# Altium PCB PCB1.PcbDoc
Units mil, origin at the board's own origin, x right, y up, seen from the top; angles counter-clockwise.
Board outline 5120 x 2360 mil, 2 copper layers (Top Layer, Bottom Layer); 11 components, 7 nets, 53 pads, 0 vias.
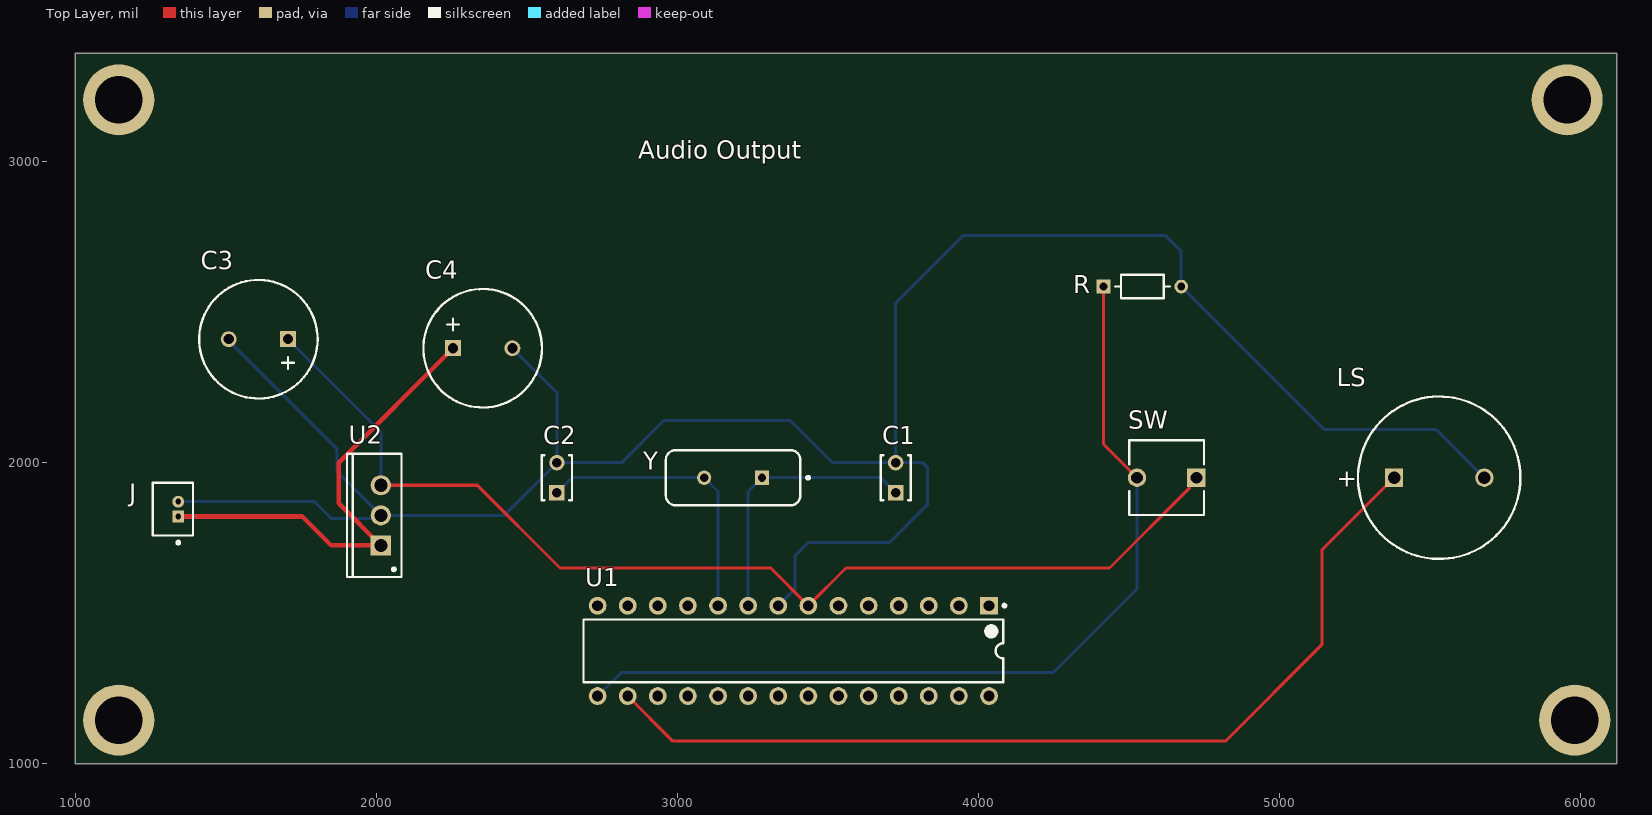
[diagram p0: Top Layer view]
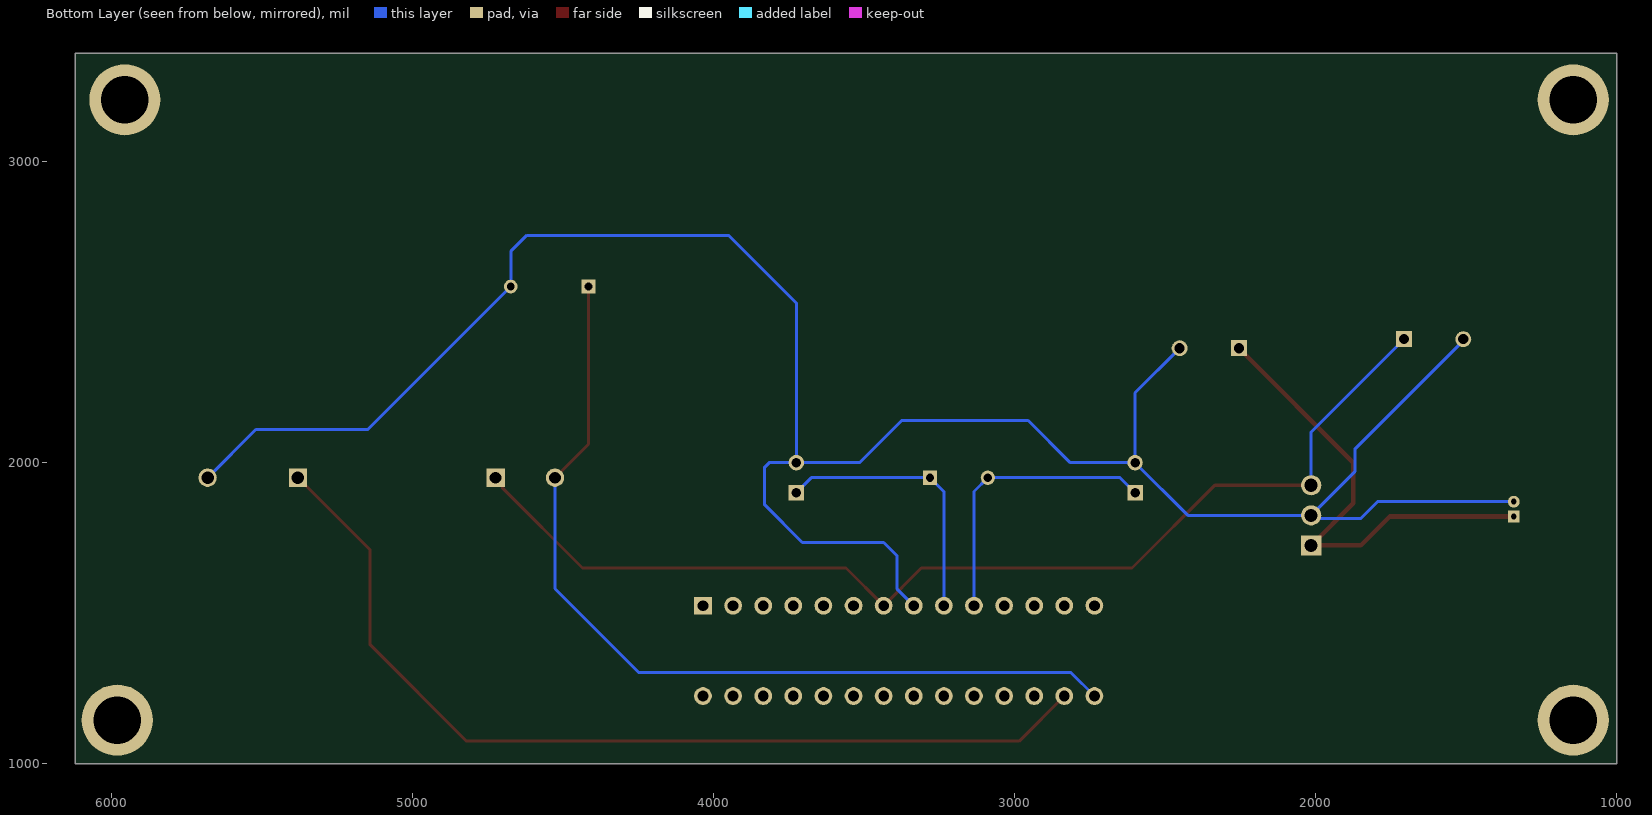
[diagram p1: Bottom Layer view, seen from below]

## Layer stack, top to bottom
Top Solder: solder mask 0.4, Solder Resist, Dk 3.5
Top Layer: signal copper 1.4
Dielectric 1: dielectric 12.6, FR-4, Dk 4.8
Bottom Layer: signal copper 1.4
Bottom Solder: solder mask 0.4, Solder Resist, Dk 3.5

## Board outline
1000,1000 6120,1000 6120,3360 1000,3360

## Design rules (kind name [scope] priority, off if disabled: settings)
Clearance [All] p1: gap=10 ignorepadtopadclearanceinfootprint=FALSE except(0: Arc-Hole Track-Hole SMDPad-Hole THPad-Hole Via-Hole Fill-Hole Poly-Hole Region-Hole Text-Hole)
PolygonConnect [All] p1: connectstyle=Relief reliefconductorwidth=10 reliefentries=4 polygonreliefangle="90 Angle" airgapwidth=10
RoutingVias [All] p1: holewidth=12 width=25 viastyle="Through Hole" minholewidth=8 minwidth=15 maxholewidth=125 maxwidth=130
SolderMaskExpansion [All] p1: expansion=4
Width [All] p1: maxlimit=100 minlimit=10 preferedwidth=20
30 further rules are at their usual default settings.

## Components (designator, comment, footprint, x,y, rotation, side; value= is the part's Value field where it differs from the comment)
C1 "22pF" KEMT-C315-THT-2 3725,1950 r90 top
C2 "22pF" KEMT-C315-THT-2 2600,1950 r90 top
C3 "10uF" NIC-UVC2G100MPD1TD-2_V 1608.43,2410 r180 top
C4 "10uF" NIC-UVC2G100MPD1TD-2_V 2353.43,2380 r0 top
J "53047-0210" FP-53047-0210-MFG 1324.57,1845.79 r270 top
LS "KPEG242" KINGS-KPEG242-2 5530,1950 r0 top
R "CF18JT10K0" FP-CF18-MFG 4544.13,2585 r0 top value=10kO
SW "EVQ-21505R" FP-EVQ-21505R-MFG 4625,1950 r180 top
U1 "ATmega328-PU" 28P3 3385,1375 r270 top
U2 "L7805CV" TO220 2015,1825 r90 top
Y "16MHz" FOX-FOXSLF160-20 3185,1950 r180 top

## Footprints (in the part's own frame and the unit in brackets; to place one, negate y for a bottom-side part, rotate by r counter-clockwise, add the part's x,y. Pads: shape width x height; smd on the part's side, far side on the other; paste and mask are expansions set on the pad)
28P3 [mm] "28-Pin Plastic Dual In-Line Package (PDIP)"
  rect 1.5x1.5 hole 0.9: 1(-3.81,16.51)
  round 1.5 hole 0.9: 2(-3.81,13.97) 3(-3.81,11.43) 4(-3.81,8.89) 5(-3.81,6.35) 6(-3.81,3.81) 7(-3.81,1.27) 8(-3.81,-1.27) 9(-3.81,-3.81) 10(-3.81,-6.35) 11(-3.81,-8.89) 12(-3.81,-11.43) 13(-3.81,-13.97) 14(-3.81,-16.51) 15(3.81,-16.51) 16(3.81,-13.97) 17(3.81,-11.43) 18(3.81,-8.89) 19(3.81,-6.35) 20(3.81,-3.81) 21(3.81,-1.27) 22(3.81,1.27) 23(3.81,3.81) 24(3.81,6.35) 25(3.81,8.89) 26(3.81,11.43) 27(3.81,13.97) 28(3.81,16.51)
  silkscreen extent -3.93,-17.7 2.65,17.94, body extent -3.6,-17.65 3.6,17.65, height 4.58
FOX-FOXSLF160-20 [mm] "THD, 2-Leads, Body 11.35x4.65mm"
  rect 1.2x1.2 hole 0.7: 1(-2.44,0)
  round 1.2 hole 0.7: 2(2.44,0)
  silkscreen extent -6.45,-2.33 5.68,2.33, body extent -5.67,-2.32 5.68,2.33, height 3.6
FP-53047-0210-MFG [mm]
  rect 1x1 hole 0.5 paste-1000 mask+0: 1(0.625,0.45)
  round 1 hole 0.5 paste-1000 mask+0: 2(-0.625,0.45)
  silkscreen extent -2.23,-1.7 2.95,1.7, body extent -2.32,-1.8 2.32,1.8, height 0.25
FP-CF18-MFG [mm]
  rect 1.15x1.15 hole 0.65 paste-1000 mask+0: 1(-3.28,0)
  round 1.15 hole 0.65 paste-1000 mask+0: 2(3.28,0)
  silkscreen extent -2.31,-1 2.3,1, body extent -3.96,-1.1 3.96,1.1, height 0.25
FP-EVQ-21505R-MFG [mm]
  rect 1.55x1.55 hole 1 paste-1000 mask+0: A(-2.5,0)
  round 1.55 hole 1 paste-1000 mask+0: B(2.5,0)
  silkscreen extent -3.15,-3.15 3.15,3.15, body extent -3.37,-3.25 3.37,3.25, height 0.25
KEMT-C315-THT-2 [mm] "THD, 2-Leads, Body 3.81x2.54mm"
  rect 1.3x1.3 hole 0.8: 1(-1.27,0)
  round 1.3 hole 0.8: 2(1.27,0)
  silkscreen extent -1.91,-1.27 1.91,1.27, body extent -1.91,-1.27 1.91,1.27, height 4.66
KINGS-KPEG242-2 [mm] "THD, 2-Leads, Dia 13.7mm, Pitch 7.62mm"
  rect 1.55x1.55 hole 1.05: 1(-3.81,0)
  round 1.55 hole 1.05: 2(3.81,0)
  silkscreen extent -6.85,-6.85 6.85,6.85, body extent -6.85,-6.85 6.85,6.85, height 7.6
NIC-UVC2G100MPD1TD-2_V [mm] "2-Leads, Radial Lead 10x14.5mm,Lead-wire Diameter 0.6mm, Pin Spacing 5mm"
  rect 1.35x1.35 hole 0.85: 1(-2.5,0)
  round 1.35 hole 0.85: 2(2.5,0)
  silkscreen extent -5,-5 5,5, body extent -5,-5 5,5, height 14.5
TO220 [mm] "TO, Thru-Hole, Vertical, Heatsink Mounted; 3 In-Line Leads; Pitch 2.54 mm"
  rect 1.7x1.7 hole 1.1: 1(-2.54,0)
  round 1.7 hole 1.1: 2(0,0) 3(2.54,0)
  silkscreen extent -5.2,-1.75 5.2,2.85, body extent -5.25,-1.8 5.25,2.9, height 19.7

## Part data
C1 C2: library part CMP-1664-00008-1, "Capacitor, Ceramic, 22 pF, +/-10 %, 100 V, -55 to 125 degC, 2-Pin THD, RoHS, Bulk", Case\Package=TO-220, Max Input Voltage="40 V", Max Operating Temperature="125 degC", Max Ouput Current="1.5 A", Min Input Voltage="4.2 V", Min Operating Temperature="0 degC", Output Voltage="1.2 V", Package Quantity=50, ComponentLink1Description="Manufacturer URL", ComponentLink1URL=http://www.kemet.com/, ComponentLink2Description=Datasheet, ComponentLink2URL=http://capacitoredge.kemet.com/capedge2/DataSheet/Datasheet-C315C220K1G5TA.pdf?pn=C315C220K1G5TA{BULK}, DatasheetVersion=Aug-16, Height="9.28 mm", Length="10.28 mm", Mount="Through Hole", Output Current="1.5 A", Outputs=1, PackageDescription="2-Pin Through Hole Device, Body 3.81 x 2.54 mm", PackageReference=C315-THT-2, Packaging=Rail/Tube, Pins=3, Radiation Hardening=No, REACH SVHC="No SVHC", RoHSCompliant=true, Weight="0.08113 oz", Width="4.82 mm"
C3 C4: library part CMP-0743-00001-1, "Aluminum Electrolytic Capacitor, High Voltage, Ultra-Miniature-Sized for adapters, Polar, 400 V, 10uF, +/-20% Tolerance, -40 to 105 degC, 10 x 12.5 mm D X L, RoHS, Bulk", Capacitance Tolerance="+/- 20%", Category Temperature Range="-40 to 105 degC", Leakage Current (Short Term)="260 mA", Manufacturer=Nichicon, PartNumber=UVC2G100MPD1TD, Rated Capacitance Range="10 uF", Rated Ripple Current (at 100kHz)="150 mA", Rated Ripple Current (at 120Hz)="100 mA", Rated Voltage="400 V", ComponentLink1Description="Manufacturer URL", ComponentLink1URL=http://www.nichicon.co.jp/, ComponentLink2Description=Datasheet, ComponentLink2URL=http://nichicon-us.com/english/products/pdfs/e-vc.pdf, ComponentLink3Description="Package Specification", ComponentLink3URL=http://nichicon-us.com/english/products/pdfs/e-vc.pdf, DatasheetVersion=Sep-13, Diameter="10 mm", Length="12.5 mm", Mounting Technology="Through Hole", PackageDescription="2-Pin Radial Lead 10 x 12.5 mm, Lead-wire Diameter 0.6 mm, Pin Spacing 5 mm", PackageReference=UVC2G100MPD1TD-2, PackageVersion=Sep-13, Packing=Bulk, RoHS=TRUE, Series=VC
J: library part CMP-2000-05628-3, "CONN HEADER VERT 2POS 1.25MM", Ambient Temperature Range High=+85°C, Ambient Temperature Range Low=-40°C, Current Rating=1A, Manufacturer=Molex, Package=0, Temperature="-40°C to +85°C", Voltage Rating=125V, Automotive=No, Category=Conn, ComponentLink2Description=Datasheet, ComponentLink2URL=http://www.molex.com/webdocs/datasheets/pdf/en-us/0530470210_PCB_HEADERS.pdf, Conn Gender=Male, Conn Orientation=Vertical, Contact Material=Tin, Device Class L1=Connectors, Device Class L2="Headers and Wire Housings", Device Class L3=unset, Digikey Description="CONN HEADER VERT 2POS 1.25MM", Footprint Url=https://www.molex.com/pdm_docs/sd/530470210_sd.pdf, Height=4.4mm, Lead Free=Yes, Manufacturer Part Number=53047-0210, Mouser Description="1.25mm Pitch PicoBlade™ Wire-to-Board Header, Vertical, with Friction Lock, 2 Circuits", Number Of Contacts=2, Number Of Rows=1, Octopart=https://octopart.com/53047-0210-molex-276772, Pitch=1.25mm, RoHS=TRUE, Temperature Range High=+85°C, Temperature Range Low=-40°C
LS: library part CMP-2000-06518-1, "Piezo Indicator, 4100 Hz, 3 to 16 V, -20 to 70 degC, 2-Pin THD, RoHS", Current - Max=7A, Frequency Range=3600to4600Hz, Manufacturer=KingstateElectronicsCorp., Maximum Resonant Frequency=4600Hz, Maximum Supply Current=7mA, Operating Temperature=-20to70°C, Package Description="2-Pin Through Hole Device, Body Dia 13.7 mm, Pitch 7.62 mm", PartNumber=KPE-242, Typical Operating Supply Voltage=12Vdc, Category=AudioIndicatorsandAlerts, Datasheet URL=https://datasheet.ciiva.com/11776/0900766b8068f3a2-11776713.pdf, Datasheet Version=01/2006, Manufacturer URL=http://www.kingstate.com.tw/index.php/en/, Minimum Sound Pressure=70dBA, Mounting=ThroughHole, Mounting Technology=ThroughHole, Package Reference=KPEG242, Product Diameter=13.7mm, Product Height=7.6mm, Technology=Piezo, Termination Method=Pin, Tone Mode=Continuous, Type=Indicator
R: library part CMP-26528-000002-1, "RES 10K OHM 1/8W 5% CF AXIAL", Manufacturer="Stackpole Electronics", Package=CF18, Power Rating=0.125W, Resistance=10kO, Temperature="-55°C to +155°C", Temperature Coefficient=0-500ppm/°C, Temperature Range High=+155°C, Temperature Range Low=-55°C, Tolerance=5%, Voltage Rating=250V, Automotive=No, Category=Res, ComponentLink2Description=Datasheet, ComponentLink2URL=http://www.seielect.com/Catalog/SEI-CF_CFM.pdf, Composition="Carbon Film", Device Class L1="Passive Components", Device Class L2=Resistors, Device Class L3="Through-Hole Resistors", Digikey Description="RES 10K OHM 1/8W 5% CF AXIAL", Height=2mm, Ipc Land Pattern Name=RESAD656W65L360D200, Lead Free=Yes, Manufacturer Part Number=CF18JT10K0, Octopart=https://octopart.com/cf18jt10k0-stackpole+electronics-19205642, RoHS=TRUE, Series=CF
SW: library part CMP-05618-000118-1, "SWITCH TACTILE SPST-NO 0.02A 15V", Actuator Color=Red, Case/Package=Radial, Contact Current Rating=20mA, Contact Resistance=50mR, Max Operating Temperature=70°C, Max Voltage Rating (DC)=15V, Min Operating Temperature=-20°C, Operating Force=1.6N, Package Quantity=1, Actuator Length=1.6mm, Actuator Type=Standard, Contact Plating=Silver, Current Rating=20mA, Depth=6mm, Electrical Life=100000Cycles, Height=5mm, Illumination Type=Non-Illuminated, Lead Free="Lead Free", Length=6mm, Max Current Rating=20mA, Mechanical Life=100000Cycles, Mount="Through Hole", Orientation=Straight, Packaging="Tape and Reel", Series=EVQ2, Size=6mm, Switch Function=Off-Mom, Switch Travel=0.25mm, Termination="PC Pin", Throw Configuration=SPST, Voltage Rating (DC)=15V, Width=6mm
U1: library part CMP-0095-00015-2, "8-bit AVR Microcontroller, 32KB Flash, 1KB EEPROM, 2KB SRAM, 28-pin PDIP, Industrial Grade (-40°C to 85°C)", ComponentLink1Description="Manufacturer URL", ComponentLink1URL=http://www.atmel.com/, ComponentLink2Description="ATmega48A/48PA/88A/88PA/168A/168PA/328/328P Datasheet", ComponentLink2URL=http://www.atmel.com/dyn/resources/prod_documents/8271.pdf, ComponentLink3Description="ATmega48A/48PA/88A/88PA/168A/168PA/328/328P Summary", ComponentLink3URL=http://www.atmel.com/dyn/resources/prod_documents/8271S.pdf, DatasheetVersion="revD, May-2011", PackageDescription="28-lead (0.300\"/7.62mm Wide) Plastic Dual Inline Package (PDIP)", PackageReference=28P3, PackageVersion="revB, Sep-2001", RevisionNote="DatasheetVersion updated. URLs added."
U2: library part CMP-0244-00483-1, "Positive Voltage Regulator, 5V, 3-Pin TO-220", ComponentLink1Description="Manufacturer URL", ComponentLink1URL=http://www.st.com, ComponentLink2Description=Datasheet, ComponentLink2URL=http://www.st.com/internet/com/TECHNICAL_RESOURCES/TECHNICAL_LITERATURE/DATASHEET/CD00000444.pdf, ComponentLink3Description="Package Specification", ComponentLink3URL=http://www.st.com/internet/com/TECHNICAL_RESOURCES/TECHNICAL_LITERATURE/PACKAGE_INFORMATION/CD00004649.pdf, DatasheetVersion=16/11/2011, PackageDescription="TO, Thru-Hole, Vertical, Heatsink Mounted; 3 In-Line Leads; Pitch 2.54 mm", PackageReference=TO220, PackageVersion=ver3.0
Y: library part CMP-1749-00003-1, "Resistance Weld Thru-Hole Crystal, 16 MHz, -20 to 70 degC, 2-Pin THD, RoHS, Bulk", Case\Package=Axial, Max Operating Temperature="155 degC", Min Operating Temperature="-55 degC", Package Quantity=200, Power Rating="250 mW", Resistance="221 kohm", Tolerance=1%, Voltage Rating="250 V", ComponentLink1Description="Manufacturer URL", ComponentLink1URL=http://www.foxonline.com/, ComponentLink2Description=Datasheet, ComponentLink2URL=http://www.foxonline.com/pdfs/hc49slf.pdf, DatasheetVersion=Mar-15, Length="0.248 inch", Mount="Through Hole", PackageDescription="2-Pin Through Hole Device, Body 11.35 x 4.65 mm", PackageReference=FOXSLF160-20, Packaging=Bulk, RoHSCompliant=true

## Free pads (board coordinates)
  round 236.22 hole 157.48: MH1(5955,3205) MH2(1145,1145) MH2(1145,3205) MH4(5980,1145)

## Nets (pads, with @x,y where several pads share a name; then routed paths per layer and width w, separated by ;. In a path a pad name is that pad's centre, name@x,y a point inside that pad or via, vN(x,y) a via of type N, cw(c..) or ccw(c..) an arc to the next point about the centre after c; other vN are vias at no path point)
GND: C1.2 C2.2 C3.2 C4.2 J.2 LS.2 R.2 U1.8 U2.2 | length 7748.2
  Bottom Layer w10: J.2 1794.61,1870.39 1850,1815 2005,1815 U2.2 ; C3.2 1510,2405 1870,2045 1870,1970 U2.2 ; C4.2 2600,2231.85 C2.2 ; U1.8 3390,1580 3390,1690 3435,1735 3705,1735 3830,1860 3830,1985 3815,2000 C1.2 ; LS.2 5520,2110 5148.27,2110 R.2 4673.27,2701.73 4620,2755 3950,2755 3725,2530 C1.2 ; U2.2 2425,1825 C2.2 ; C2.2 2815,2000 2955,2140 3375,2140 3515,2000 C1.2
NetC1_1: C1.1 U1.9 Y.1 | length 908.7
  Bottom Layer w10: U1.9 3235,1903.94 Y.1 3675,1950 C1.1
NetC2_1: C2.1 U1.10 Y.2 | length 953.7
  Bottom Layer w10: C2.1 2650,1950 Y.2 3135,1903.94 U1.10
NetC3_1: C3.1 SW.A U1.7 U2.3 | length 3701.8
  Top Layer w10: C3.1@1690,2393.15 C3.1 ; U2.3 2335,1925 2610,1650 3310,1650 U1.7 3560,1650 4435,1650 4700,1915 4700,1926.57 SW.A SW.A@4715,1950
  Bottom Layer w10: C3.1 2015,2101.85 U2.3
NetLS_1: LS.1 U1.16 | length 3154.1
  Top Layer w10: U1.16 2985,1075 4820,1075 5140,1395 5140,1710 LS.1
NetR_1: R.1 SW.B U1.15 | length 2988.9
  Top Layer w10: R.1 4415,2061.57 SW.B
  Bottom Layer w10: U1.15 2812.62,1302.62 4247.62,1302.62 4526.57,1581.57 SW.B
"VCC 9V": C4.1 J.1 U2.1 | length 1582.9
  Top Layer w15: J.1 1753.82,1821.18 1850,1725 U2.1 1875,1865 1875,2000 C4.1
pads on no net: U1.1 U1.2 U1.3 U1.4 U1.5 U1.6 U1.11 U1.12 U1.13 U1.14 U1.17 U1.18 U1.19 U1.20 U1.21 U1.22 U1.23 U1.24 U1.25 U1.26 U1.27 U1.28

## Silkscreen, mask and mechanical layers (free items; w line width, h text height)
Top Overlay:
  text "Audio Output" at 2870,3010 h60

## Text inside footprints (layer, text, board x,y; h text height)
LS: Top Overlay "+" at 5190,1920 h60